# Altium PCB 升压模块12V转15V.PcbDoc
Units mil, origin at the board's own origin, x right, y up, seen from the top; angles counter-clockwise.
Board outline 2765 x 2555 mil, 2 copper layers (Top Layer, Bottom Layer); 29 components, 21 nets, 98 pads, 218 vias.
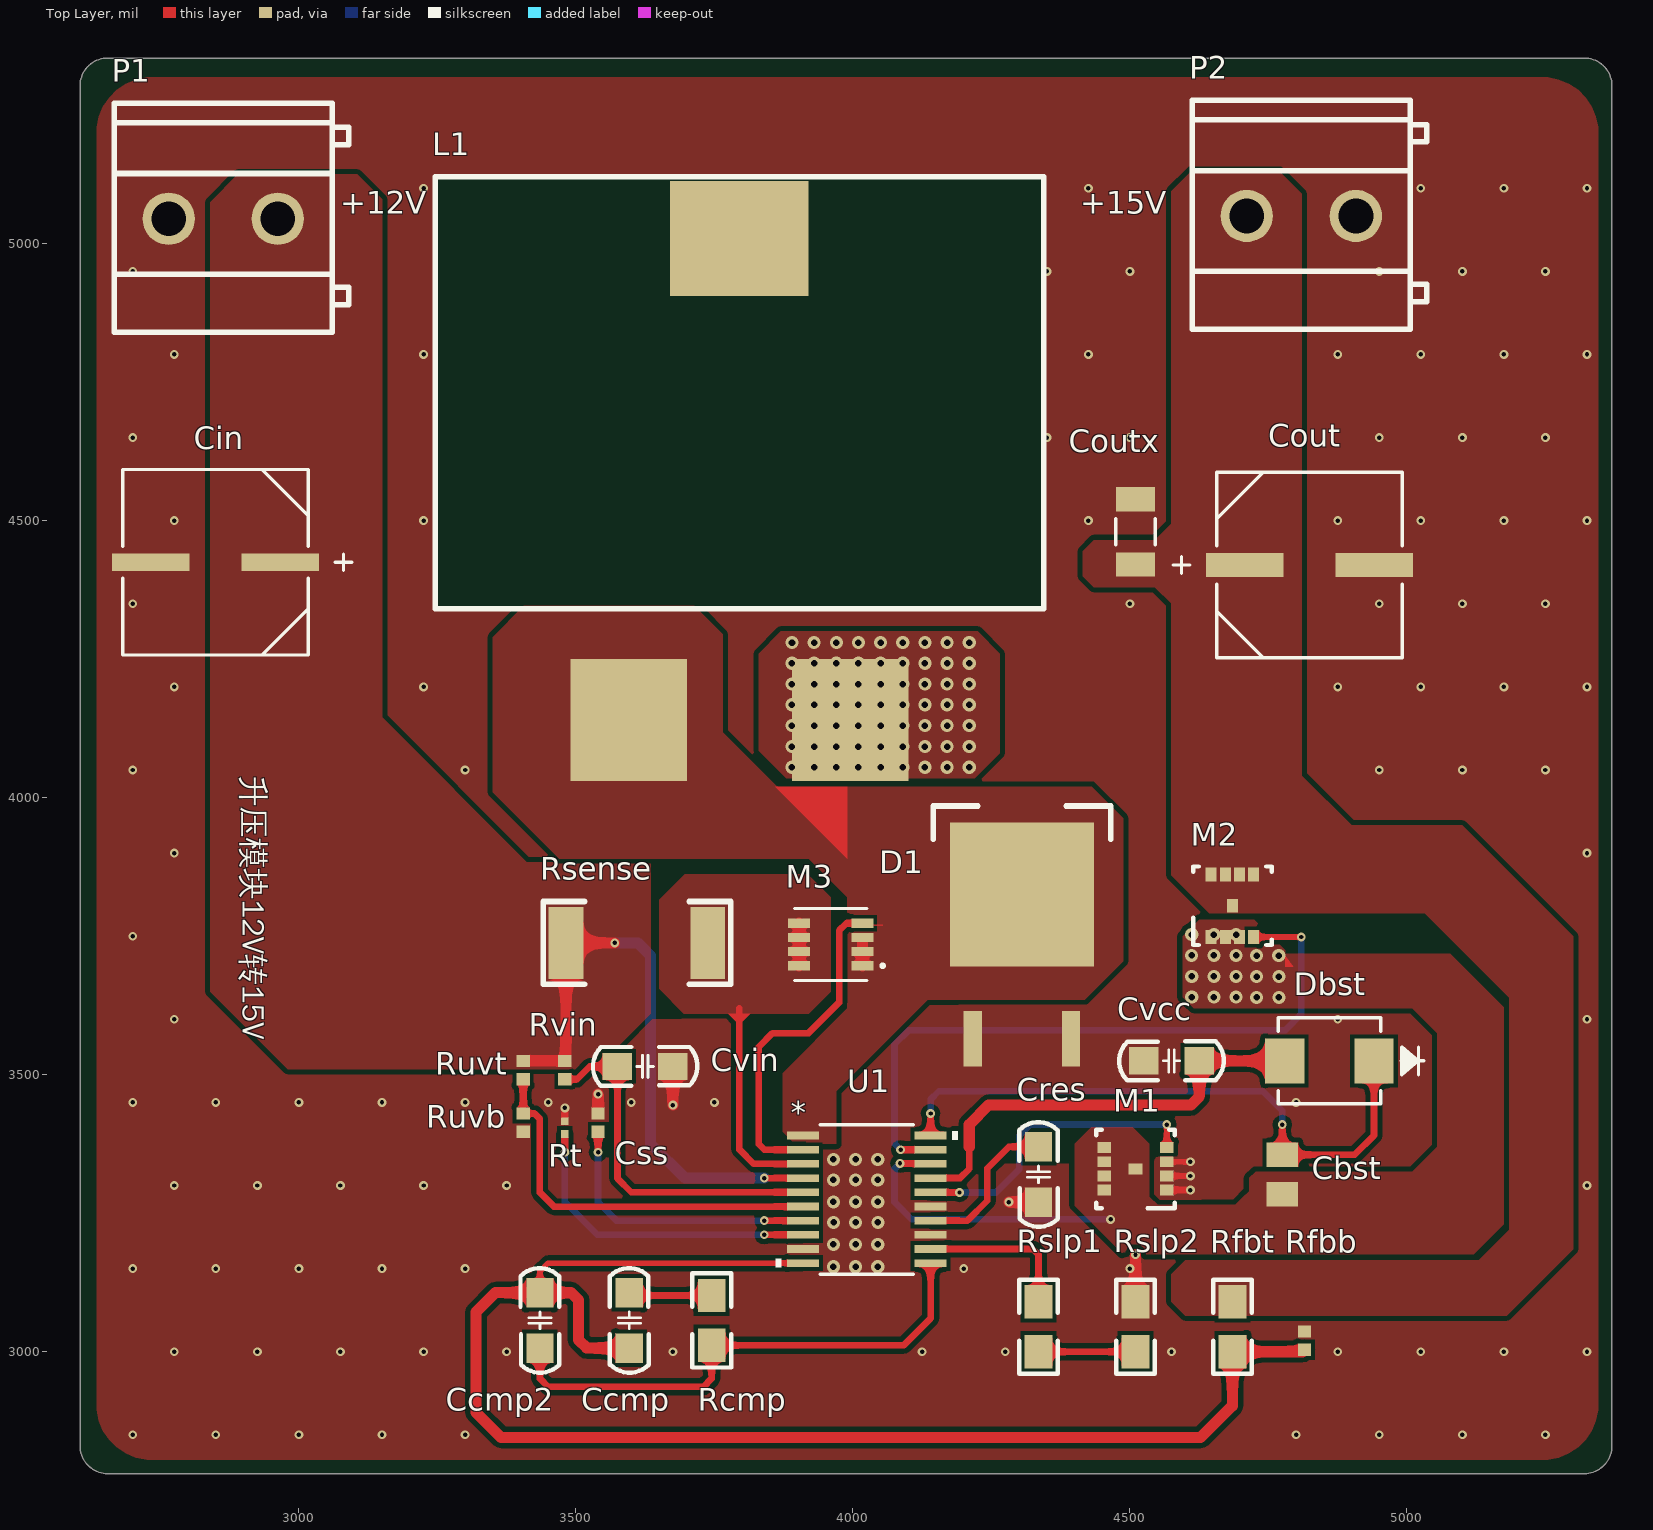
[diagram p0: Top Layer view]
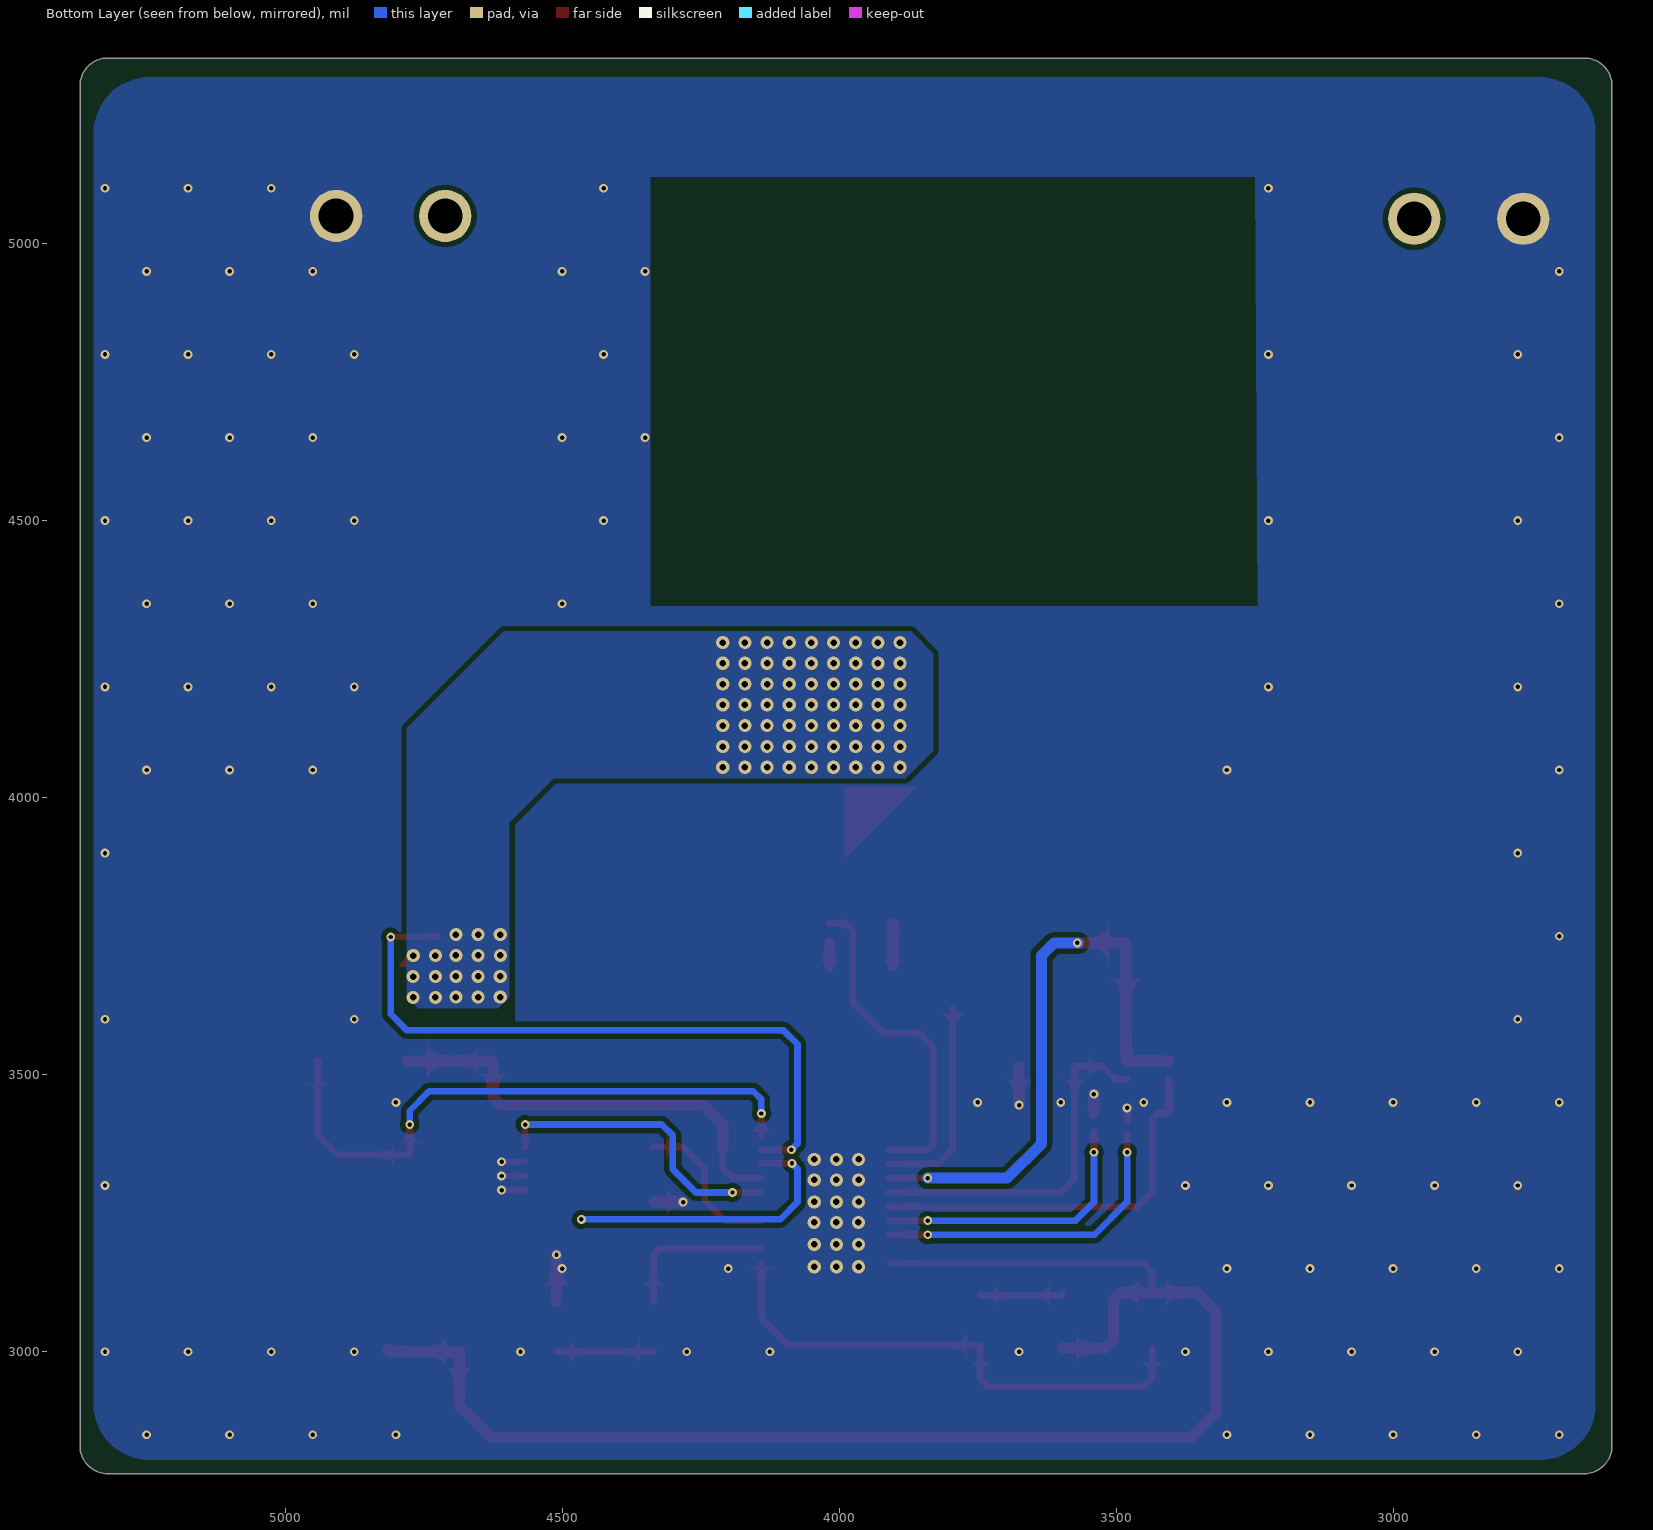
[diagram p1: Bottom Layer view, seen from below]

## Layer stack, top to bottom
Top Solder: solder mask 0.4, Solder Resist, Dk 3.5
Top Layer: signal copper 1.4
Dielectric 1: dielectric 12.6, FR-4, Dk 4.8
Bottom Layer: signal copper 1.4
Bottom Solder: solder mask 0.4, Solder Resist, Dk 3.5

## Board outline
2605,2830 2605,5285 cw(c2655,5285) 2655,5335 5320,5335 cw(c5320,5285) 5370,5285 5370,2830 cw(c5320,2830) 5320,2780 2655,2780 cw(c2655,2830)

## Design rules (kind name [scope] priority, off if disabled: settings)
Clearance [All] p1: gap=9 ignorepadtopadclearanceinfootprint=TRUE except(0: Arc-Hole Track-Hole SMDPad-Hole THPad-Hole Via-Hole Fill-Hole Poly-Hole Region-Hole Text-Hole; 7: SMDPad-Fill SMDPad-Poly SMDPad-Region; 8: Arc-THPad Track-THPad THPad-THPad Via-Via)
PolygonConnect [All] p1: connectstyle=Direct reliefconductorwidth=20 reliefentries=4 polygonreliefangle="90 Angle" airgapwidth=10
RoutingVias [All] p1: holewidth=11.81 width=23.62 viastyle="Through Hole" minholewidth=11.81 minwidth=23.62 maxholewidth=11.81 maxwidth=23.62
SolderMaskExpansion [All] p1: expansion=4
Width PWR [InNetClass('PWR')] p1: maxlimit=20 minlimit=12 preferedwidth=20
Width Singal [InNetClass('Singal')] p2: maxlimit=20 minlimit=10 preferedwidth=12
30 further rules are at their usual default settings.

## Components (designator, comment, footprint, x,y, rotation, side; value= is the part's Value field where it differs from the comment)
Cbst "C0805C104M5RACTU" 0805 4775,3320 r90 top value=100nF
Ccmp "4.7nF" 0805C 3601.41,3106.5 r270 top (schematic designator Ccomp)
Ccmp2 "220nF" 0805C 3430,3006.5 r90 top (schematic designator Ccomp2)
Cin "20SVPF180M" CAPSMT_62_E7 2849.42,4425 r180 top value=180uF
Cout "20SVPF390M" CAPSMT_62_E12 4824,4420 r0 top value=390uF
Coutx "C3216X5R1E476M160AC" 1206 4510,4480 r90 top value=47uF
Cres "470nF" 0805C 4330,3270 r90 top
Css "GRM155R71E393KA88D" 0402 3540,3413.5 r90 top value=39nF
Cvcc "10uF" 0805C 4525,3530 r0 top
Cvin "470nF" 0805C 3675,3510 r180 top
D1 "SBRD10200TR" DPAK 4305,3825 r0 top value=950mV
Dbst "B220-13-F" SMB 4860,3525 r180 top value=500mV
L1 "SER2915L-682KL" SER2915L 3245.98,5120.91 r0 top value=6.8uH
M1 "CSD16327Q3" DQG0008A 4510,3330 r180 top value=25V
M2 "CSD17575Q3" DQG0008A 4685,3805 r90 top value=30V
M3 "FDMC7660DC" TRANS_Fairchild_ 3960,3735 r180 top value=30V
P1 "KF128-5.0-2P" CONN-TH_P5.00_KF128-5.0-2P 2863.43,5045 r180 top
P2 "KF128-5.0-2P" CONN-TH_P5.00_KF128-5.0-2P 4809.29,5050 r180 top
Rcmp "62k" 0805R 3745,3011.5 r90 top (schematic designator Rcomp)
Rfbb "CRCW04023K74FKED" 0402 4815,3020 r90 top value=3.74k
Rfbt "43k" 0805R 4685,3000 r90 top
Rsense "8mΩ,1W" R2512 3610,3737.8 r0 top
Rslp1 "2k" 0805R 4335,3000 r90 top (schematic designator Rslope1)
Rslp2 "160k" 0805R 4510,3090 r270 top (schematic designator Rslope2)
Rt "RC0201FR-0728K7L" 0201 3480,3404.5 r90 top value=28.7k
Ruvb "CRCW04027K87FKED" 0402 3405,3413.5 r90 top value=7.87k
Ruvt "CRCW040249K9FKED" 0402 3405,3508.39 r90 top value=49.9k
Rvin "CRCW04023R01FKED" 0402 3480,3508.39 r90 top value=3.01
U1 "LM5121MH/NOPB" PWP20_TEX 4025,3275 r0 top

## Footprints (in the part's own frame and the unit in brackets; to place one, negate y for a bottom-side part, rotate by r counter-clockwise, add the part's x,y. Pads: shape width x height; smd on the part's side, far side on the other; paste and mask are expansions set on the pad)
0201 [mil]
  rect 14x13 smd: 1(-11.5,0) 2(11.5,0)
0402 [mil]
  rect 22x24 smd: 1(-16.5,0) 2(16.5,0)
0805 [mil]
  rect 44x57 smd: 1(-35.5,0) 2(35.5,0)
0805C [mm]
  rect 1.35x1.25 smd: 1(0,-0.127) 2(2.54,-0.127)
  silkscreen extent -1.12,-1.02 3.66,0.76, body extent 0,-0.76 2.51,0.48, height 0.79
0805R [mil]
  rect 60x50 smd: 1(0,0) 2(90,0)
  silkscreen extent -40,-35 130,35, body extent -4,-25 94,24, height 31
1206 [mil]
  rect 44x71 smd: 1(-59,0) 2(59,0)
  silkscreen extent -24,-36 24,36
CAPSMT_62_E7 [mil]
  rect 140x32 smd: 1(-117,0) 2(117,0)
  silkscreen extent -246,-168 168,168
CAPSMT_62_E12 [mil]
  rect 140x43 smd: 1(-117,0) 2(117,0)
  silkscreen extent -246,-168 168,168
CONN-TH_P5.00_KF128-5.0-2P [mm]
  round 2.4 hole 1.6: 1(-2.5,0) 2(2.5,0)
  silkscreen extent -5.76,-5.3 5,5.2
DPAK [mil]
  rect 33x100 smd: 1(-88.5,-260) 3(88.5,-260)
  rect 260x260 smd: 2(0,0)
  silkscreen extent -160,100 160,160
DQG0008A [mm]
  rect 0.63x0.5 smd: 1(-1.435,0.975) 2(-1.435,0.325) 3(-1.435,-0.325) 4(-1.435,-0.975) 5(1.435,-0.975) 6(1.435,-0.325) 7(1.435,0.325) 8(1.435,0.975) 9(0,0)
  silkscreen extent -1.8,-1.8 1.8,1.8
PWP20_TEX [mm]
  rect 1.461x0.351 smd paste+0 mask+0.051: 1(-2.925,2.925) 2(-2.925,2.275) 3(-2.925,1.625) 4(-2.925,0.975) 5(-2.925,0.325) 6(-2.925,-0.325) 7(-2.925,-0.975) 8(-2.925,-1.625) 9(-2.925,-2.275) 10(-2.925,-2.925) 11(2.925,-2.925) 12(2.925,-2.275) 13(2.925,-1.625) 14(2.925,-0.975) 15(2.925,-0.325) 16(2.925,0.325) 17(2.925,0.975) 18(2.925,1.625) 19(2.925,2.275) 20(2.925,2.925)
  Top Layer region: -2.925,2.925
  silkscreen extent -4.16,-3.43 4.16,3.43, body extent 0,0 0.25,0.25, height 0.25
R2512 [mm]
  rect 1.6x3.3 smd: 1(-3.25,0) 2(3.25,0)
  silkscreen extent -4.3,-1.9 4.3,1.9
SER2915L [mm]
  rect 5.33x5.59 smd: 1(8.875,-24.915) 2(19.025,-24.915)
  rect 6.35x5.28 smd: ""(13.95,-2.84)
  silkscreen extent 0,-19.8 27.9,0
SMB [mil]
  rect 71x81 smd: 1(-80.5,0) 2(80.5,0)
  silkscreen extent -171,-78 93,78
TRANS_Fairchild_ [mm]
  rect 1.005x0.42 smd: 1(-1.452,0.975) 2(-1.452,0.325) 3(-1.452,-0.325) 4(-1.452,-0.975) 5(1.452,-0.975) 6(1.452,-0.325) 7(1.452,0.325) 8(1.452,0.975)
  silkscreen extent -2.46,-1.65 1.65,1.65

## Part data
Cbst: library part Cbst, Manufacturer Name=Kemet, Manufacturer Part Number=C0805C104M5RACTU, PackageReference=C0805C104M5RACTU
Ccmp Ccmp2 Cres Cvcc Cvin: library part CAP, "Capacitor"
Cin: library part Cin, Manufacturer Name=Panasonic, Manufacturer Part Number=20SVPF180M, PackageReference=20SVPF180M
Cout: library part Cout, Manufacturer Name=Panasonic, Manufacturer Part Number=20SVPF390M, PackageReference=20SVPF390M
Coutx: library part Coutx, "C3216X5R1E476M16", Manufacturer Name=TDK, Manufacturer Part Number=C3216X5R1E476M160AC, PackageReference=C3216X5R1E476M160AC
Css: library part Css, "GRM155R71E393KA8", Manufacturer Name=MuRata, Manufacturer Part Number=GRM155R71E393KA88D, PackageReference=GRM155R71E393KA88D
D1: library part D1, Manufacturer Name="SMC Diode Solutions", Manufacturer Part Number=SBRD10200TR, PackageReference=SBRD10200TR
Dbst: library part Dbst, Manufacturer Name="Diodes Inc.", Manufacturer Part Number=B220-13-F, PackageReference=B220-13-F
L1: library part 电感-SER2915L, Manufacturer Name=Coilcraft, Manufacturer Part Number=SER2915L-682KL, PackageReference=SER2915L-682KL
M1: library part M1, Manufacturer Name="Texas Instruments", Manufacturer Part Number=CSD16327Q3, PackageReference=CSD16327Q3
M2: library part M2, Manufacturer Name="Texas Instruments", Manufacturer Part Number=CSD17575Q3, PackageReference=CSD17575Q3
M3: library part M3, Manufacturer Name="Fairchild Semiconductor", Manufacturer Part Number=FDMC7660DC, PackageReference=FDMC7660DC
P1 P2: library part KF128-2P, BOM_Manufacturer="Cixi Kefa Elec", BOM_Manufacturer Part=KF128-5.0-2P, BOM_Supplier=LCSC, BOM_Supplier Part=C474950, Contributor=LCSC, spicePre=U, spiceSymbolName=KF128-5.0-2P
Rcmp Rfbt Rslp1 Rslp2: library part Res, "Resistor"
Rfbb: library part Rfbb, Manufacturer Name=Vishay-Dale, Manufacturer Part Number=CRCW04023K74FKED, PackageReference=CRCW04023K74FKED
Rsense: library part 采样电阻
Rt: library part Rt, Manufacturer Name=Yageo, Manufacturer Part Number=RC0201FR-0728K7L, PackageReference=RC0201FR-0728K7L
Ruvb: library part Ruvb, Manufacturer Name=Vishay-Dale, Manufacturer Part Number=CRCW04027K87FKED, PackageReference=CRCW04027K87FKED
Ruvt: library part Ruvt, Manufacturer Name=Vishay-Dale, Manufacturer Part Number=CRCW040249K9FKED, PackageReference=CRCW040249K9FKED
Rvin: library part Rvin, Manufacturer Name=Vishay-Dale, Manufacturer Part Number=CRCW04023R01FKED, PackageReference=CRCW04023R01FKED
U1: Built_By=EMA_Jessica, Copyright="Copyright (C) 2018 Accelerated Designs. All rights reserved", Manufacturer_Part_Number=LM5121MH/NOPB, RefDes=RefDes, SourceLibrary=TI_2019-05-10, Type=DEV, Vendor="Texas Instruments"

## Via types
v1: diameter 16, hole 8, Top Layer to Bottom Layer, tented both sides, 119 vias
v2: diameter 23.62, hole 11.81, Top Layer to Bottom Layer, tented both sides, 99 vias

## Nets (pads, with @x,y where several pads share a name; then routed paths per layer and width w, separated by ;. In a path a pad name is that pad's centre, name@x,y a point inside that pad or via, vN(x,y) a via of type N, cw(c..) or ccw(c..) an arc to the next point about the centre after c; other vN are vias at no path point)
+12V: Cin.1 P1.1 Rsense.1 Ruvt.2 Rvin.2 U1.4 | length 1090.9
  Top Layer w12: v1(3840,3313.39) U1.4
  Top Layer w20: Ruvt.2 Rvin.2 3482.05,3526.93 Rsense.1@3482.05,3735 ; Rsense.1 v1(3570,3737.8)
  Bottom Layer w20: v1@3567.8,3737.8 v1(3570,3737.8) 3612.2,3737.8 3635,3715 3635,3375 3696.61,3313.39 v1(3840,3313.39)
+15V: Cout.1 Coutx.1 M2.5 M2.6 M2.7 M2.8 M2.9 P2.2 Rfbt.2
CSN: M3.5 M3.6 M3.7 M3.8 Rsense.2 U1.3 | length 457.4
  Top Layer w12: 3795,3620 3795,3365 3821.02,3338.98 U1.3
  Top Layer w20: M3.8 M3.7 M3.6 M3.5
FB: Ccmp2.2 Ccmp.2 Rfbb.1 Rfbt.1 U1.10 | length 2711.8
  Top Layer w10: Ccmp2.2 3435,3145 3449.84,3159.84 U1.10
  Top Layer w20: Ccmp.2 3519.61,3006.5 3505,3021.11 3505,3093 3491.5,3106.5 Ccmp2.2 3355,3106.5 3320,3071.5 3320,2890 3365,2845 4627.5,2845 4685,2902.5 Rfbt.1 4811.5,3000 Rfbb.1
GND: Cin.2 Cout.2 Coutx.2 Cres.1 Css.2 Cvcc.1 Cvin.1 D1.1 D1.3 M1.1 M1.2 M1.3 P1.2 P2.1 Rfbb.2 Rslp2.1 Rt.2 Ruvb.1 U1.9 U1.13 U1.15 | length 395.4
  Top Layer w10: M1.2 v1(4609.17,3317.2) ; M1.3 v1(4609.17,3342.8)
  Top Layer w12: Rt.2 v1(3480,3440) ; M1.1 v1(4609.17,3291.61)
  Top Layer w20: Css.2 v1(3540,3465) ; v1(3675,3445) Cvin.1 ; v1(4281.61,3270) Cres.1 ; Rslp2.1 v1(4510,3175)
  other v1: 2700,2850 2850,2850 3000,2850 3150,2850 3300,2850 4800,2850 4950,2850 5100,2850 5250,2850 2775,3000 2925,3000 3075,3000 3225,3000 3375,3000 3675,3000 4125,3000 4275,3000 4575,3000 4875,3000 5025,3000 5175,3000 5325,3000 2700,3150 2850,3150 3000,3150 3150,3150 3300,3150 4200,3150 4500,3150 2775,3300 2925,3300 3075,3300 3225,3300 3375,3300 5325,3300 2700,3450 2850,3450 3000,3450 3150,3450 3300,3450 3450,3450 3600,3450 3750,3450 4800,3450 2775,3600 4875,3600 5325,3600 2700,3750 2775,3900 5325,3900 2700,4050 3300,4050 4950,4050 5100,4050 5250,4050 2775,4200 3225,4200 4875,4200 5025,4200 5175,4200 5325,4200 2700,4350 4500,4350 4950,4350 5100,4350 5250,4350 2775,4500 3225,4500 4425,4500 4875,4500 5025,4500 5175,4500 5325,4500 2700,4650 4350,4650 4500,4650 4950,4650 5100,4650 5250,4650 2775,4800 3225,4800 4425,4800 4875,4800 5025,4800 5175,4800 5325,4800 2700,4950 4350,4950 4500,4950 4950,4950 5100,4950 5250,4950 3225,5100 4425,5100 5025,5100 5175,5100 5325,5100
  other v2: 3964.82,3153.29 4004.82,3153.29 4044.82,3153.29 3964.84,3193.72 4004.84,3193.72 4044.84,3193.72 3965,3233.29 4005,3233.29 4045,3233.29 3964.84,3270.49 4004.84,3270.49 4044.84,3270.49 3964.82,3309.98 4004.82,3309.98 4044.82,3309.98 3964.84,3347.26 4004.84,3347.26 4044.84,3347.26
NetCbst_1: Cbst.1 L1.2 M1.5 M1.6 M1.7 M1.8 M1.9 M2.1 M2.2 M2.3 U1.18 | length 531.1
  Top Layer w12: v1@4086.13,3340.03 U1.18@4140.16,3340.03
  Bottom Layer w12: v1(4085,3340) 4075,3330 4075,3270 4106.2,3238.8 v1(4465,3238.8)
  other v2: 4611.51,3640 4651.51,3640 4691.51,3640 4728.69,3639.6 4768.69,3639.6 4611.54,3677.28 4651.54,3677.28 4691.54,3677.28 4728.72,3676.88 4768.72,3676.88 4611.49,3715.4 4651.49,3715.4 4691.49,3715.4 4728.67,3715 4768.67,3715 4611.51,3752.69 4651.51,3752.69 4691.51,3752.69 3889.93,4055 3929.93,4055 3969.93,4055 4009.93,4055 4049.93,4055 4089.93,4055 4129.93,4055 4169.93,4055 4209.93,4055 3889.95,4092.28 3929.95,4092.28 3969.95,4092.28 4009.95,4092.28 4049.95,4092.28 4089.95,4092.28 4129.95,4092.28 4169.95,4092.28 4209.95,4092.28 3889.95,4130 3929.95,4130 3969.95,4130 4009.95,4130 4049.95,4130 4089.95,4130 4129.95,4130 4169.95,4130 4209.95,4130 3889.95,4167.72 3929.95,4167.72 3969.95,4167.72 4009.95,4167.72 4049.95,4167.72 4089.95,4167.72 4129.95,4167.72 4169.95,4167.72 4209.95,4167.72 3889.98,4205 3929.98,4205 3969.98,4205 4009.98,4205 4049.98,4205 4089.98,4205 4129.98,4205 4169.98,4205 4209.98,4205 3889.98,4242.72 3929.98,4242.72 3969.98,4242.72 4009.98,4242.72 4049.98,4242.72 4089.98,4242.72 4129.98,4242.72 4169.98,4242.72 4209.98,4242.72 3890,4280 3930,4280 3970,4280 4010,4280 4050,4280 4090,4280 4130,4280 4170,4280 4210,4280
NetCbst_2: Cbst.2 Dbst.1 U1.20 | length 1114.5
  Top Layer w12: U1.20 v1(4140.16,3430) ; v1(4775,3410) Cbst.2 4905.5,3355.5 4940.5,3390.5 Dbst.1
  Bottom Layer w12: v1(4140.16,3430) 4140.16,3455.16 4155,3470 4740,3470 4775,3435 v1(4775,3410)
NetCcomp2_1: Ccmp2.1 Rcmp.1 U1.11 | length 952.4
  Top Layer w12: Ccmp2.1 3435,2951.5 3450,2936.5 3730,2936.5 3745,2951.5 Rcmp.1 4091.5,3011.5 4140.16,3060.16 U1.11
NetCcomp_1: Ccmp.1 Rcmp.2 | length 150.7
  Top Layer w12: Ccmp.1 3601.41,3101.5 Rcmp.2
NetCres_2: Cres.2 U1.14 | length 284.3
  Top Layer w12: U1.14 4206.61,3236.61 4242.5,3272.5 4242.5,3330.89 4281.61,3370 Cres.2
NetCss_1: Css.1 U1.7 | length 511.3
  Top Layer w12: v1(3540,3360) Css.1 ; v1(3840,3236.61) U1.7
  Bottom Layer w12: v1(3540,3360) 3540,3270 3573.39,3236.61 3838.39,3236.61 v1@3840,3235
NetD1_2: D1.2 L1.1 M3.1 M3.2 M3.3 U1.1 | length 41.2
  Top Layer w20: M3.1 M3.2 4017.18,3737.79
NetM1_4: M1.4 U1.16 | length 556.7
  Top Layer w10: M1.4 v1(4566.5,3410)
  Top Layer w12: U1.16 4140.16,3287.44 4194.18,3287.44 v1@4194.23,3287.39
  Bottom Layer w12: v1(4192.39,3287.39) 4258.35,3287.39 4300,3329.04 4300,3390 4320,3410 v1(4566.5,3410)
NetM2_4: M2.4 U1.19 | length 1231
  Top Layer w10: M2.4 v1(4809.29,3748.5)
  Top Layer w12: v1@4086.13,3364.57 U1.19
  Bottom Layer w12: v1(4086.11,3364.54) 4075,3375.65 4075,3555 4100,3580 4780,3580 4809.29,3609.29 v1(4809.29,3748.5)
NetM3_4: M3.4 U1.2 | length 615
  Top Layer w12: U1.2 3840.43,3364.57 3830,3375 3830,3550 3855,3575 3920,3575 3975,3630 3975,3760 3988.39,3773.39 M3.4
NetRslope1_1: Rslp1.1 Rslp2.2 | length 175
  Top Layer w12: Rslp1.1 Rslp2.2
NetRslope1_2: Rslp1.2 U1.12 | length 284.2
  Top Layer w12: U1.12 4324.57,3185.43 4335,3175 Rslp1.2
NetRt_1: Rt.1 U1.8 | length 577.3
  Top Layer w12: v1(3480,3360) Rt.1 ; v1(3840,3211) U1.8
  Bottom Layer w12: v1(3480,3360) 3480,3270 3539,3211 v1(3840,3211)
UVLO: Ruvb.2 Ruvt.1 U1.6 | length 714.4
  Top Layer w12: Ruvt.1 Ruvb.2 3425,3430 3435,3420 3435,3287.2 3460.41,3261.8 3909.43,3261.8 U1.6
VCC: Cvcc.2 Dbst.2 U1.17 | length 811.9
  Top Layer w12: U1.17 4193.39,3313.39 4210,3330 4210,3370
  Top Layer w20: 4210,3370 4210,3410 4245,3445 4610,3445 4625,3460 Cvcc.2 Dbst.2
VIN: Cvin.2 Rvin.1 U1.5 | length 652
  Top Layer w12: Rvin.1 3501.89,3491.89 3525,3515 Cvin.2 3575,3312.8 3600,3287.8 U1.5
pads on no net: L1.

## Polygon pours and split planes (outlines as drawn)
GND on Top Layer "GND_L01_P076" (solid, remove dead copper, pour order 76): 5245,5300 cw(c5245,5200) 5345,5200 5345,2905 cw(c5245,2905) 5245,2805 2735,2805 cw(c2735,2905) 2635,2905 2635,5200 cw(c2735,5200) 2735,5300
NetD1_2 on Top Layer "NETD1_2_L01_P012" (solid, remove dead copper, pour order 12): 3350,4010 3470,3890 3920,3890 3990,3820 3990,3735.21 3990,3620 3873.04,3503.04 3873.04,3397.12 3895.16,3375 3970,3375 3970,3470 4135,3635 4135,3747.79 3765,4117.79 3765,4295 3685,4375 3435,4375 3350,4290
+15V on Top Layer "Top Layer-+15V 1" (solid, remove dead copper, pour order 64): 5130,3165 5185,3220 5185,3639.15 5032.5,3791.65 4643.35,3791.65 4575,3860 4575,5095 4610,5130 4770,5130 4810,5090 4810,4040 4900,3950 5100,3950 5300,3750 5300,3185 5180,3065 4600,3065 4575,3090 4575,3140 4600,3165
+12V on Top Layer "Top Layer-+12V" (solid, remove dead copper, pour order 60): 3411.49,3883.51 3150,4145 3150,5080 3105,5125 2890,5125 2840,5075 2840,3650 2980,3510 3535.39,3510 3635,3609.61 3635,3883.51
NetCbst_1 on Top Layer "NETCBST_1_L01_P048" (solid, remove dead copper, pour order 48): 3830,4260 3870,4300 4225,4300 4265,4260 4265,4080 4220,4035 3880,4035 3830,4085
NetCbst_1 on Top Layer "Top Layer-NetCbst_1" (solid, remove dead copper, pour order 52): 4400,3375 4400,3264.34 4488.67,3175.68 5120.68,3175.68 5175,3230 5175,3621.49 5078.43,3718.06 4768.5,3718.06 4743.23,3692.78 4743.23,3636.77 4760,3620 5010,3620 5055,3575 5055,3370 5010,3325 4726.61,3325 4715,3313.39 4715,3290 4690,3265 4550,3265 4535,3280 4535,3375 4505,3405 4430,3405
NetCbst_1 on Top Layer "NETCBST_1_L01_P034" (solid, remove dead copper, pour order 34): 4625,3780 4724.75,3780 4780,3724.75 4780,3640 4760,3620 4615,3620 4595,3640 4595,3750
NetD1_2 on Top Layer "NETD1_2_L01_P014" (solid, remove dead copper, pour order 14): 3990,4019.96 4430.94,4019.96 4487.6,3963.31 4487.6,3704.55 4418.04,3635 4135,3635 3990,3780
GND on Top Layer "Top Layer-GND 1" (solid, remove dead copper, pour order 70): 4625,3355 4641.36,3338.64 4641.36,3286.61 4626.36,3271.61 4556.36,3271.61 4543.86,3284.11 4543.86,3343.96 4554.91,3355
GND on Top Layer "Top Layer-GND 2" (solid, remove dead copper, pour order 68): 4526.61,3628.39 4562.5,3592.5 4562.5,3495 4535,3467.5 4187.5,3467.5 4145,3510 4145,3580 4193.39,3628.39
+15V on Top Layer "Top Layer-+15V" (solid, remove dead copper, pour order 66): 4545,4465 4580,4500 4580,4345 4545,4380 4435,4380 4415,4400 4415,4445 4435,4465
no net on Top Layer "Top Layer-No Net" (solid, remove dead copper, pour order 58): 3540,3870
no net on Top Layer "Top Layer-No Net 1" (solid, remove dead copper, pour order 56): 3520,3855
no net on Top Layer "Top Layer-No Net 2" (solid, remove dead copper, pour order 54): 3540,3840.75
no net on Top Layer "NONET_L01_P024" (solid, remove dead copper, pour order 24): 4632.5,3780
no net on Top Layer "NONET_L01_P020" (solid, remove dead copper, pour order 20): 4632.5,3780
no net on Top Layer "NONET_L01_P016" (solid, remove dead copper, pour order 16): 4445,3395
no net on Top Layer "NONET_L01_P008" (solid, remove dead copper, pour order 8): 4012.21,3770 4053.39,3770
no net on Top Layer "NONET_L01_P004" (solid, remove dead copper, pour order 4): 3905,3375
CSN on Top Layer "CSN_L01_P002" (solid, remove dead copper, pour order 2): 3696.07,3861.5 3918.5,3861.5 3960,3820 3960,3650 3920,3610 3695,3610 3650,3655 3650,3815.43
no net on Top Layer "NONET_L01_P000" (solid, remove dead copper, pour order 0): 3685,3861.5
GND on Bottom Layer "GND_L02_P072" (solid, remove dead copper, pour order 72): 5245,5300 cw(c5245,5200) 5345,5200 5345,2905 cw(c5245,2905) 5245,2805 2735,2805 cw(c2735,2905) 2635,2905 2635,5200 cw(c2735,5200) 2735,5300
NetCbst_1 on Bottom Layer "NETCBST_1_L02_P044" (solid, remove dead copper, pour order 44): 3830,4085 3880,4035 4515,4035 4595,3955 4595,3640 4615,3620 4760,3620 4780,3640 4780,4125 4605,4300 3870,4300 3830,4260

## Other copper
Top Layer:
  pour cut-out: 3245,5120
  pour cut-out: 3245,5120
  region: 4576.91,3352.26
  region net GND: 4574.8,3334.43 4579.02,3338.64 4585,3338.64
  region: 4574.8,3334.43
  region net GND: 4575,3340
  region: 4574.8,3334.43
  region: 4574.8,3334.43
  region: 4580,3334.18
  pour cut-out: 4430,3430 4551.36,3430 4560.33,3421.03 4560.33,3385.31 4552.85,3377.83 4532.17,3377.83 4505,3405 4430,3405
  pour cut-out: 3691.1,3600.58 3690.32,3599.8 3637.46,3599.8 3637.46,3645.86 3641.6,3650
  pour cut-out: 4226.31,3344.46 4226.31,3397.47 4258.84,3430 4430,3430 4435,3425 4435,3410 4400,3375 4400,3340.43 4230.35,3340.43
  pour cut-out: 4178.92,3407.06 4194.94,3407.06 4195.58,3406.42 4195.58,3330 4179.22,3330 4178.92,3329.7
  pour cut-out: 3860,3575 3920,3575 3920,3563.32 3863.62,3506.94 3869.14,3501.42 3869.14,3397.64 3872.44,3397.64 3875.08,3395 3871.08,3391 3871.08,3381.22 3847.53,3381.22 3847.19,3380.88 3830,3398.07 3830,3550
  region net NetCbst_1: 4780,3715 4780,3695 4795,3695
  region net NetD1_2: 3990,4019.96 3860.04,4019.96 3990,3890
  region net CSN: 3795,3590 3795,3610 3815,3610
  region net CSN: 3775,3610 3795,3610 3795,3590
Bottom Layer:
  pour cut-out: 4585.58,3636.1 4585.58,3580.58 4590,3585 4785,3585 4810,3610 4810,3640 4780,3640 4760,3620 4615,3620 4595,3640
  pour cut-out: 4587.79,3632.79
Multi-Layer:
  pour cut-out: 3250,5120 4340,5120 4340,4346.2 3245,4346.2 3245,4345

## Silkscreen, mask and mechanical layers (free items; w line width, h text height)
Top Overlay:
  text "+12V" at 3075,5040 h70
  text "+15V" at 4410,5040 h70
  text "升压模块12V转15V" at 2885,4040 h70 r270
Mechanical 1:
  lines w10: 2605,2830 ccw(c2655,2830) 2655,2780 5320,2780 ccw(c5320,2830) 5370,2830 5370,5285 ccw(c5320,5285) 5320,5335 2735,5335 2655,5335 ccw(c2655,5285) 2605,5285 2605,2830

## Dimensions
2605,5285 to 5370,5285 on Mechanical 1
2735,5335 to 2655,2780 on Mechanical 1

## Text inside footprints (layer, text, board x,y; h text height)
U1: Top Overlay "*" at 3887.34,3398.97 h70; Mechanical 13 "*" at 3938.92,3351.92 h70